# Altium PCB Main11_8.PcbDoc
Units mm, origin at the board's own origin, x right, y up, seen from the top; angles counter-clockwise.
Board outline 74.8 x 55.24 mm, 2 copper layers (Top Layer, Bottom Layer), stack 0.533 mm thick; 21 components, 21 nets, 79 pads, 4 vias.
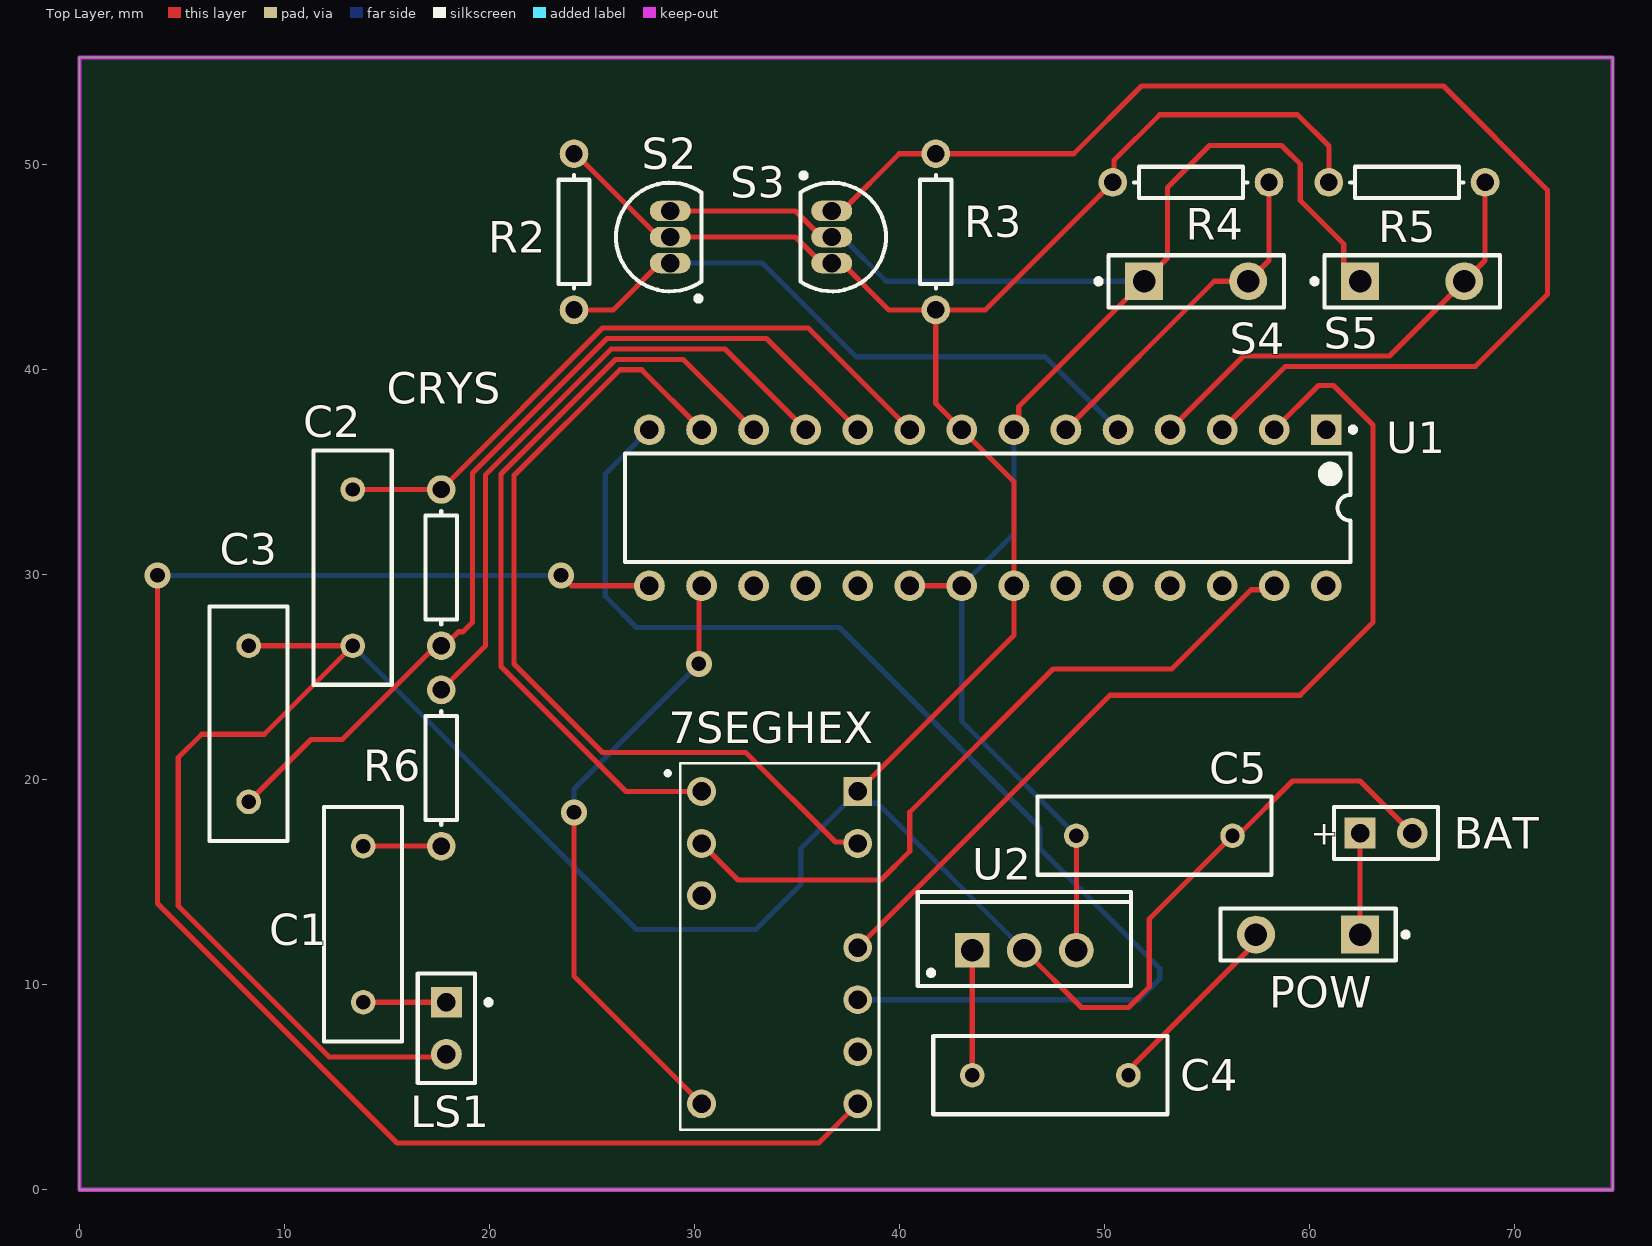
[diagram p0: Top Layer view]
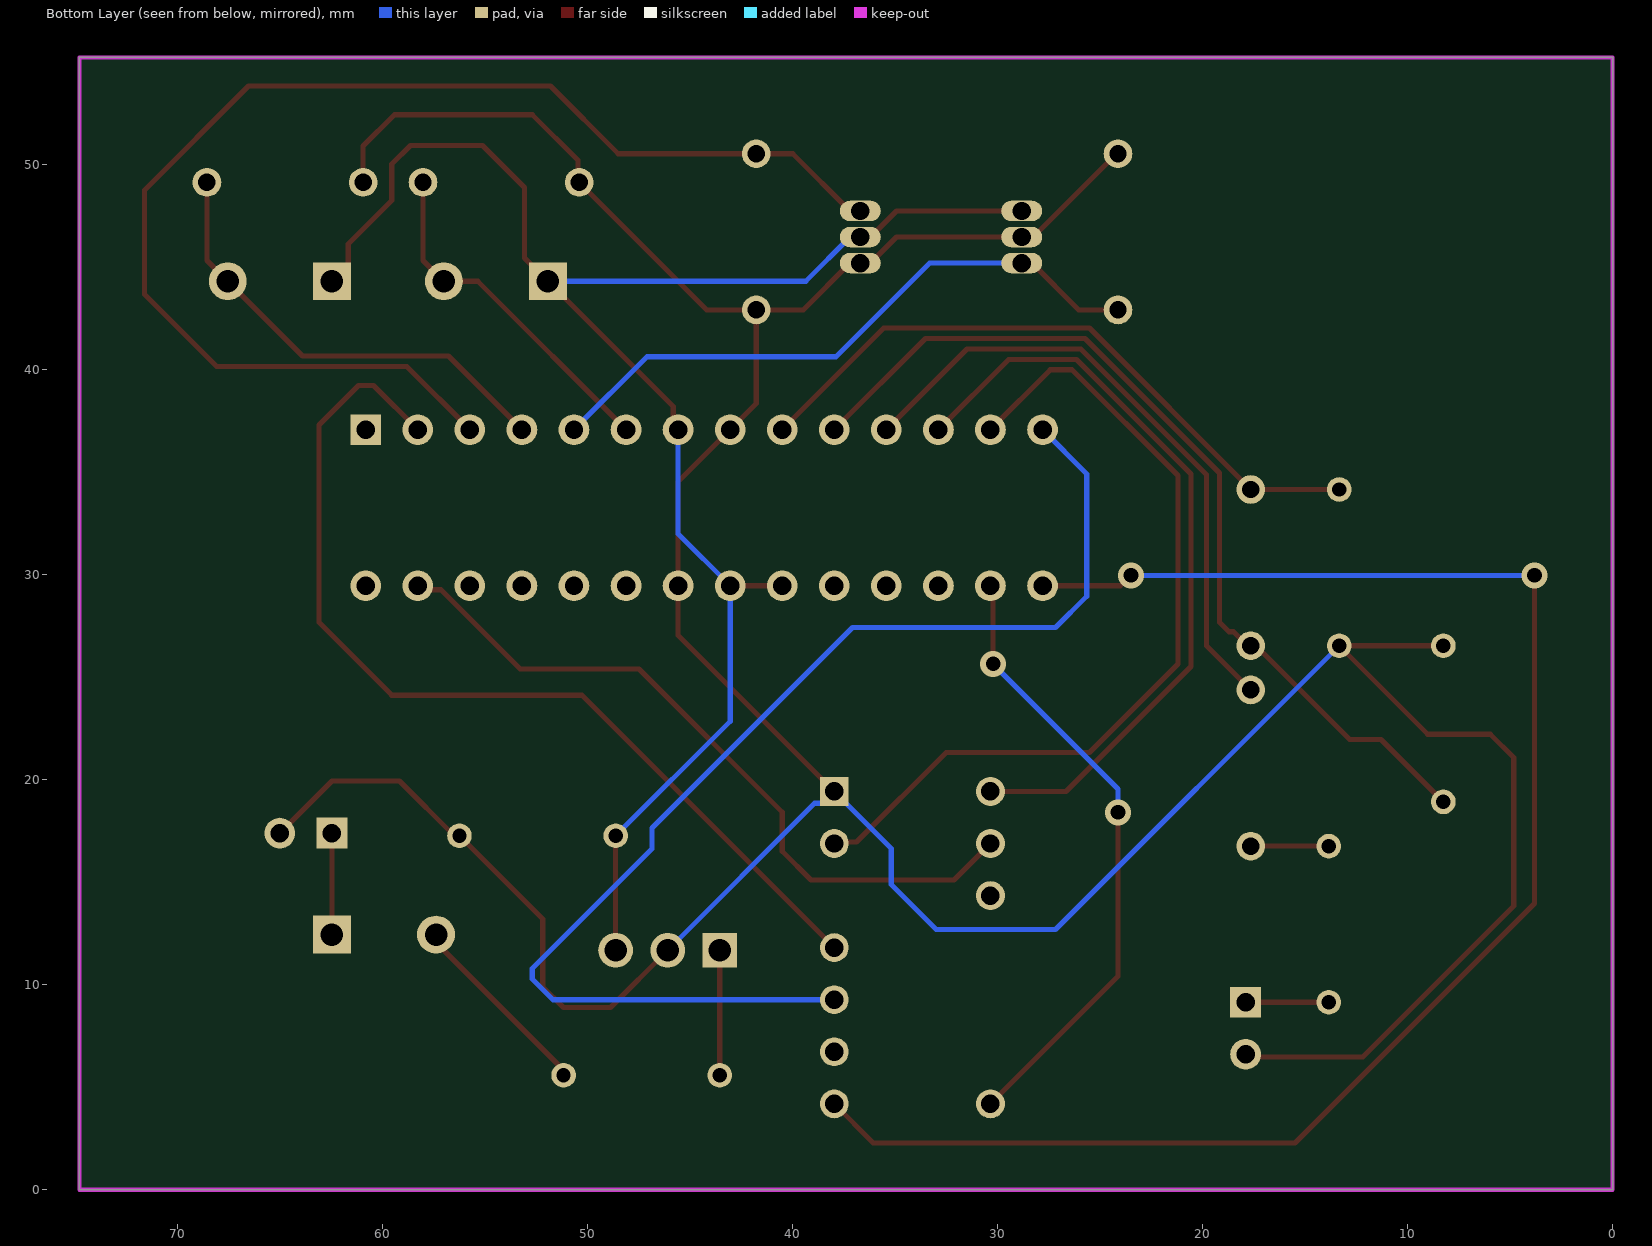
[diagram p1: Bottom Layer view, seen from below]

## Layer stack, top to bottom
Top Solder: solder mask 0.0102, Solder Resist, Dk 3.5
Top Layer: signal copper 0.0356
Dielectric 2: prepreg 0.0711, PP-006, Dk 4.1
Dielectric 1: dielectric 0.32, FR-4, Dk 4.8
Dielectric 3: prepreg 0.0711, PP-006, Dk 4.1
Bottom Layer: signal copper 0.0356
Bottom Solder: solder mask 0.0102, Solder Resist, Dk 3.5

## Board outline
0,0 0,55.245 74.803,55.245 74.803,0

## Design rules (kind name [scope] priority, off if disabled: settings)
BoardOutlineClearance [All] p1: gap=0.305 ignorepadtopadclearanceinfootprint=FALSE
Clearance [All] p1: gap=0.178 ignorepadtopadclearanceinfootprint=TRUE except(0.61: Arc-Via Track-Via SMDPad-Via THPad-Via Via-Via Via-Fill Via-Poly Via-Region Via-Text Via-Hole)
DiffPairsRouting [All] p1: maxlimit=0.254 minlimit=0.178 mostfreqgap=0.254 toplayer_minwidth=0.152 toplayer_maxwidth=0.381 toplayer_prefwidth=0.203 bottomlayer_minwidth=0.152 bottomlayer_maxwidth=0.381 bottomlayer_prefwidth=0.203 maxuncoupledlength=12.7
HoleToHoleClearance [All] p1: gap=0.432 allowstackedmicrovias=TRUE
PolygonConnect [All] p1: connectstyle=Relief reliefconductorwidth=0.254 reliefentries=4 polygonreliefangle="90 Angle" airgapwidth=0.254
RoutingVias [All] p1: holewidth=0.762 width=0.889 viastyle="Through Hole" minholewidth=0.254 minwidth=0.279 maxholewidth=6.477 maxwidth=6.35
SilkToSilkClearance [All] p1: silktosilkclearance=0
SolderMaskExpansion SolderMaskExpansion_1 [All] p1: expansion=0.102 istentingtop=FALSE
Width [All] p1: maxlimit=254 minlimit=0.178 preferedwidth=0.508 minimp=50.000000 maximp=50.000000 favimp=50.000000
27 further rules are at their usual default settings.

## Components (designator, comment, footprint, x,y, rotation, side; value= is the part's Value field where it differs from the comment)
7SEGHEX "7SEGHEX" 7SEGHEX 28.321,2.032 r0 top
BAT "" BAT-2 63.754,17.399 r0 top (schematic designator Battery)
C1 "" RAD-0.3 13.843,12.954 r270 top value=100uF
C2 "10uF" RAD-0.3 13.335,30.353 r270 top value=100uF
C3 "10uF" RAD-0.3 8.255,22.733 r90 top value=100uF
C4 "" RAD-0.3 47.371,5.588 r0 top value=10uF
C5 "" RAD-0.3 52.451,17.272 r0 top value=10uF
CRYS "" AXIAL-0.3 17.653,30.353 r90 top value=220 (schematic designator Crystal)
LS1 "Speaker" PIN2 17.907,9.144 r270 top
POW "PowerSW" SPST-2 59.944,12.446 r180 top (schematic designator S?)
R2 "" AXIAL-0.3 24.13,46.736 r270 top value=220
R3 "" AXIAL-0.3 41.783,46.736 r90 top value=220
R4 "" AXIAL-0.3 54.229,49.149 r0 top value=220
R5 "" AXIAL-0.3 64.77,49.149 r0 top value=220
R6 "" AXIAL-0.3 17.653,20.574 r270 top value="220 (?)"
S2 "RB-Wav-26" TO-226-AA 28.829,46.482 r0 top
S3 "RB-Vel-125" TO-226-AA 36.703,46.482 r180 top
S4 "START" SPST-2 54.483,44.323 r0 top
S5 "POTEN." SPST-2 65.024,44.323 r0 top
U1 "ATmega328P-PN" 28P3 44.323,33.274 r270 top
U2 "L7805CV" TO220 46.101,11.684 r0 top

## Footprints (in the part's own frame and the unit in brackets; to place one, negate y for a bottom-side part, rotate by r counter-clockwise, add the part's x,y. Pads: shape width x height; smd on the part's side, far side on the other; paste and mask are expansions set on the pad)
7SEGHEX [mil]
  round 55.43 hole 35.43: 1(80,685) 2(80,585) 3(80,485) 4(80,85) 5(380,85) 6(380,185) 7(380,285) 8(380,385) 9(380,585)
  rect 55.43x55.43 hole 35.43: 10(380,685)
  silkscreen extent 11,35 421,739
28P3 [mm] "28-Pin Plastic Dual In-Line Package (PDIP)"
  rect 1.5x1.5 hole 0.9: 1(-3.81,16.51)
  round 1.5 hole 0.9: 2(-3.81,13.97) 3(-3.81,11.43) 4(-3.81,8.89) 5(-3.81,6.35) 6(-3.81,3.81) 7(-3.81,1.27) 8(-3.81,-1.27) 9(-3.81,-3.81) 10(-3.81,-6.35) 11(-3.81,-8.89) 12(-3.81,-11.43) 13(-3.81,-13.97) 14(-3.81,-16.51) 15(3.81,-16.51) 16(3.81,-13.97) 17(3.81,-11.43) 18(3.81,-8.89) 19(3.81,-6.35) 20(3.81,-3.81) 21(3.81,-1.27) 22(3.81,1.27) 23(3.81,3.81) 24(3.81,6.35) 25(3.81,8.89) 26(3.81,11.43) 27(3.81,13.97) 28(3.81,16.51)
  silkscreen extent -3.93,-17.7 2.65,17.94, body extent -3.6,-17.65 3.6,17.65, height 4.58
AXIAL-0.3 [mm] "Axial Device, Thru-Hole; 2 Leads; 0.3 in Pin Spacing"
  round 1.4 hole 0.85: 1(-3.81,0) 2(3.81,0)
  silkscreen extent -2.77,-0.76 2.77,0.76
BAT-2 [mm] "Battery; 2 Leads"
  rect 1.5x1.5 hole 0.9: 1(-1.27,0)
  round 1.5 hole 0.9: 2(1.27,0)
  silkscreen extent -2.54,-1.27 2.54,1.27
PIN2 [mm] "Photosensitive Diode; 2 Leads"
  rect 1.5x1.5 hole 0.9: 1(0,0)
  round 1.5 hole 0.9: 2(2.54,0)
  silkscreen extent -1.4,-1.4 3.94,2.18
RAD-0.3 [mm] "Radial Cap, Thru-Hole; 2 Leads; 0.3 in Pin Spacing"
  round 1.2 hole 0.7: 1(-3.81,0) 2(3.81,0)
  silkscreen extent -5.71,-1.91 5.71,1.91
SPST-2 [mm] "Switch; 2 Leads"
  rect 1.85x1.85 hole 1.1: 1(-2.54,0)
  round 1.85 hole 1.1: 2(2.54,0)
  silkscreen extent -4.89,-1.27 4.28,1.27
TO220 [mm] "TO, Thru-Hole, Vertical, Heatsink Mounted; 3 In-Line Leads; Pitch 2.54 mm"
  rect 1.7x1.7 hole 1.1: 1(-2.54,0)
  round 1.7 hole 1.1: 2(0,0) 3(2.54,0)
  silkscreen extent -5.2,-1.75 5.2,2.85, body extent -5.25,-1.8 5.25,2.9, height 19.7
TO-226-AA [mm] "TO, Flat Index; 3 In-Line, Axial Leads; Body Dia. 4.8mm; Leads 0.55 x 0.51 mm (max)"
  oval 2x1 hole 0.9: 1(0,-1.27) 2(0,0) 3(0,1.27)
  silkscreen extent -2.65,-3.13 1.52,2.65, body extent -2.65,-2.66 1.52,2.66, height 5.33

## Part data
7SEGHEX: "7 segment Hex display"
BAT: library part Battery, "Multicell Battery", LatestRevisionDate=17-Jul-2002, LatestRevisionNote="Re-released for DXP Platform.", PackageDescription="Battery; 2 Leads", PackageReference=BAT-2, Published=24-Mar-1999, Publisher="Altium Limited"
C1 C2 C3 C4 C5: library part Cap, "Capacitor", LatestRevisionDate=17-Jul-2002, LatestRevisionNote="Re-released for DXP Platform.", PackageDescription="Radial Cap, Thru-Hole; 2 Leads; 0.3 in Pin Spacing", PackageReference=RAD-0.3, Published=8-Jun-2000, Publisher="Altium Limited"
CRYS R2 R3 R4 R5 R6: library part Res1, "Resistor", LatestRevisionDate=17-Jul-2002, LatestRevisionNote="Re-released for DXP Platform.", PackageDescription="Axial Device, Thru-Hole; 2 Leads; 0.3 in Pin Spacing", PackageReference=AXIAL-0.3, Published=8-Jun-2000, Publisher="Altium Limited"
LS1: "Loudspeaker", LatestRevisionDate=17-Jul-2002, LatestRevisionNote="Re-released for DXP Platform.", PackageReference=PIN2, Published=24-Mar-1999, Publisher="Altium Limited"
POW S4 S5: library part SW-SPST, "Single-Pole, Single-Throw Switch", LatestRevisionDate=17-Jul-2002, LatestRevisionNote="Re-released for DXP Platform.", PackageDescription="Switch; 2 Leads", PackageReference=SPST-2, Published=24-Mar-1999, Publisher="Altium Limited"
S2 S3: library part NPN, "Mic", Code_JEDEC=TO-226-AA, LatestRevisionDate=17-Jul-2002, LatestRevisionNote="Re-released for DXP Platform.", PackageDescription="TO, Flat Index; 3 In-Line, Axial Leads; Body Dia. 4.8mm; Leads 0.55 x 0.51 mm (max)", PackageReference=TO-226-AA, Published=8-Jun-2000, Publisher="Altium Limited"
U1: library part CMP-0095-00355-1, "8-bit AVR Microcontroller, 32KB Flash, 1KB EEPROM, 2KB SRAM, 28-pin PDIP, Industrial Grade (-40°C to 105°C)", ComponentLink1Description="Manufacturer URL", ComponentLink1URL=http://www.atmel.com/, ComponentLink2Description="ATmega48A/48PA/88A/88PA/168A/168PA/328/328P Datasheet", ComponentLink2URL=http://www.atmel.com/dyn/resources/prod_documents/8271.pdf, ComponentLink3Description="ATmega48A/48PA/88A/88PA/168A/168PA/328/328P Summary", ComponentLink3URL=http://www.atmel.com/dyn/resources/prod_documents/8271S.pdf, DatasheetVersion="revD, May-2011", PackageDescription="28-lead (0.300\"/7.62mm Wide) Plastic Dual Inline Package (PDIP)", PackageReference=28P3, PackageVersion="revB, Sep-2001"
U2: library part CMP-0244-00483-1, "Positive Voltage Regulator, 5V, 3-Pin TO-220", ComponentLink1Description="Manufacturer URL", ComponentLink1URL=http://www.st.com, ComponentLink2Description=Datasheet, ComponentLink2URL=http://www.st.com/internet/com/TECHNICAL_RESOURCES/TECHNICAL_LITERATURE/DATASHEET/CD00000444.pdf, ComponentLink3Description="Package Specification", ComponentLink3URL=http://www.st.com/internet/com/TECHNICAL_RESOURCES/TECHNICAL_LITERATURE/PACKAGE_INFORMATION/CD00004649.pdf, DatasheetVersion=16/11/2011, PackageDescription="TO, Thru-Hole, Vertical, Heatsink Mounted; 3 In-Line Leads; Pitch 2.54 mm", PackageReference=TO220, PackageVersion=ver3.0

## Via types
v1: diameter 1.27, hole 0.711, Top Layer to Bottom Layer, 4 vias

## Nets (pads, with @x,y where several pads share a name; then routed paths per layer and width w, separated by ;. In a path a pad name is that pad's centre, name@x,y a point inside that pad or via, vN(x,y) a via of type N, cw(c..) or ccw(c..) an arc to the next point about the centre after c; other vN are vias at no path point)
Net7SEGHEX_1: 7SEGHEX.1 U1.12 | length 37.8
  Top Layer w0.254: 7SEGHEX.1 26.67,19.431 20.574,25.527 20.574,34.925 26.162,40.513 29.464,40.513 U1.12
Net7SEGHEX_2: 7SEGHEX.2 U1.27 | length 35.7
  Top Layer w0.254: 7SEGHEX.2 32.131,15.113 39.116,15.113 40.513,16.51 40.513,18.415 47.506,25.408 53.296,25.408 57.162,29.274 58.103,29.274 U1.27
Net7SEGHEX_4: 7SEGHEX.4 U1.16 | length 30.4
  Top Layer w0.254: v1(24.13,18.415) 24.13,10.414 7SEGHEX.4 ; v1(30.226,25.654) 30.226,29.337 U1.16
  Bottom Layer w0.254: v1(24.13,18.415) 24.13,19.558 v1(30.226,25.654)
Net7SEGHEX_5: 7SEGHEX.5 U1.15 | length 80
  Top Layer w0.254: v1(3.81,29.972) 3.81,13.97 15.494,2.286 36.068,2.286 7SEGHEX.5 ; v1(23.495,29.972) 24.003,29.464 U1.15
  Bottom Layer w0.254: v1(3.81,29.972) v1(23.495,29.972)
Net7SEGHEX_7: 7SEGHEX.7 U1.14 | length 59.9
  Bottom Layer w0.254: U1.14 25.654,34.925 25.654,28.956 27.178,27.432 37.084,27.432 46.863,17.653 46.863,16.637 52.705,10.795 52.705,10.287 51.689,9.271 7SEGHEX.7
Net7SEGHEX_8: 7SEGHEX.8 U1.2 | length 47.9
  Top Layer w0.254: 7SEGHEX.8 50.292,24.13 59.563,24.13 63.119,27.686 63.119,37.316 61.192,39.243 60.452,39.243 U1.2
Net7SEGHEX_9: 7SEGHEX.9 U1.13 | length 42.1
  Top Layer w0.254: U1.13 27.432,40.005 26.372,40.005 21.209,34.842 21.209,25.654 25.527,21.336 32.512,21.336 36.888,16.96 37.904,16.96 7SEGHEX.9
Net7SEGHEX_10: 7SEGHEX.10 BAT.2 C2.2 C3.2 C5.2 LS1.2 R2.1 R3.1 R4.1 R5.1 S2.2 S3.3 U1.8 U1.22 U2.2 | length 187.7
  Top Layer w0.254: C3.2 C2.2 9.017,22.225 5.969,22.225 4.826,21.082 4.826,13.843 12.192,6.477 17.78,6.477 LS1.2 ; R2.1 24.197,50.546 28.261,46.482 S2.2 34.933,46.482 36.203,45.212 S3.3 37.203,45.212 39.489,42.926 R3.1 ; 7SEGHEX.10 45.593,27.051 U1.22 45.593,34.544 U1.8 41.783,38.354 R3.1 ; U2.2 48.895,8.89 51.181,8.89 52.197,9.906 52.197,13.208 C5.2 ; C5.2@56.261,17.389 C5.2 ; R5.1 60.96,50.927 59.436,52.451 52.705,52.451 50.484,50.23 50.484,49.214 R4.1 44.196,42.926 R3.1 ; BAT.2 62.484,19.939 59.182,19.939 56.515,17.272 C5.2
  Bottom Layer w0.254: C2.2 27.178,12.7 32.998,12.7 35.197,14.899 35.197,16.655 7SEGHEX.10 38.55,18.854 38.931,18.854 U2.2
NetBattery_1: BAT.1 POW.1 | length 5
  Top Layer w0.254: POW.1 BAT.1
NetC1_1: C1.1 R6.2 | length 3.8
  Top Layer w0.254: C1.1 R6.2
NetC1_2: C1.2 LS1.1 | length 4.1
  Top Layer w0.254: C1.2 LS1.1
NetC2_1: C2.1 CRYS.2 U1.9 | length 32.5
  Top Layer w0.254: C2.1 CRYS.2 25.527,42.037 35.56,42.037 U1.9
NetC3_1: C3.1 CRYS.1 U1.10 | length 45.2
  Top Layer w0.254: C3.1 11.303,21.971 12.827,21.971 17.399,26.543 CRYS.1 17.819,26.543 18.501,27.224 18.715,27.224 19.177,27.686 19.177,34.965 25.741,41.529 33.528,41.529 U1.10
NetC4_1: C4.1 U2.1 | length 6.1
  Top Layer w0.254: C4.1 U2.1
NetC4_2: C4.2 POW.2 | length 9.4
  Top Layer w0.254: C4.2 51.181,5.844 57.404,12.067 POW.2
NetC5_1: C5.1 S2.3 S3.2 S4.1 S5.1 U1.7 U1.20 U1.21 U2.3 | length 85.4
  Top Layer w0.254: S2.3 34.933,47.752 36.203,46.482 S3.2 ; U1.20 U1.21 ; U1.7 45.831,37.322 45.831,38.211 S4.1 53.086,45.466 53.086,48.895 55.14,50.949 58.652,50.949 59.563,50.038 59.563,48.26 61.686,46.137 61.686,45.121 S5.1 ; U2.3 C5.1
  Bottom Layer w0.254: S3.2 37.203,46.482 39.362,44.323 S4.1 ; U1.7 45.593,32.004 U1.21 43.053,22.86 C5.1
NetR2_2: R2.2 S2.1 U1.5 | length 30.9
  Top Layer w0.254: R2.2 26.043,42.926 28.329,45.212 S2.1
  Bottom Layer w0.254: S2.1 33.315,45.212 37.887,40.64 47.117,40.64 U1.5
NetR3_2: R3.2 S3.1 U1.3 | length 63.4
  Top Layer w0.254: S3.1 37.203,47.752 39.997,50.546 R3.2 48.514,50.546 51.816,53.848 66.548,53.848 71.628,48.768 71.628,43.688 68.102,40.162 58.831,40.162 U1.3 U1.3@55.88,37.084
NetR4_2: R4.2 S4.2 U1.6 | length 17.2
  Top Layer w0.254: U1.6@48.133,37.148 U1.6 55.372,44.323 S4.2 58.039,45.339 R4.2
NetR5_2: R5.2 S5.2 U1.4 | length 22.5
  Top Layer w0.254: U1.4 56.799,40.67 63.911,40.67 67.437,44.196 S5.2@67.564,44.196 ; S5.2 68.58,45.339 R5.2
NetR6_1: R6.1 U1.11 | length 31.2
  Top Layer w0.254: R6.1 19.812,26.543 19.812,34.881 25.952,41.021 31.496,41.021 U1.11
pads on no net: 7SEGHEX.3 7SEGHEX.6 U1.1 U1.17 U1.18 U1.19 U1.23 U1.24 U1.25 U1.26 U1.28

## Keep-outs
Keep-Out Layer:
  the board outline again, w0.203

## Text inside footprints (layer, text, board x,y; h text height)
BAT: Top Overlay "+" at 60.084,16.822 h1.15